# EAGLE board HTU21D Breakout-Panel-v12 (EAGLE 6.5.0), part 1 of 2
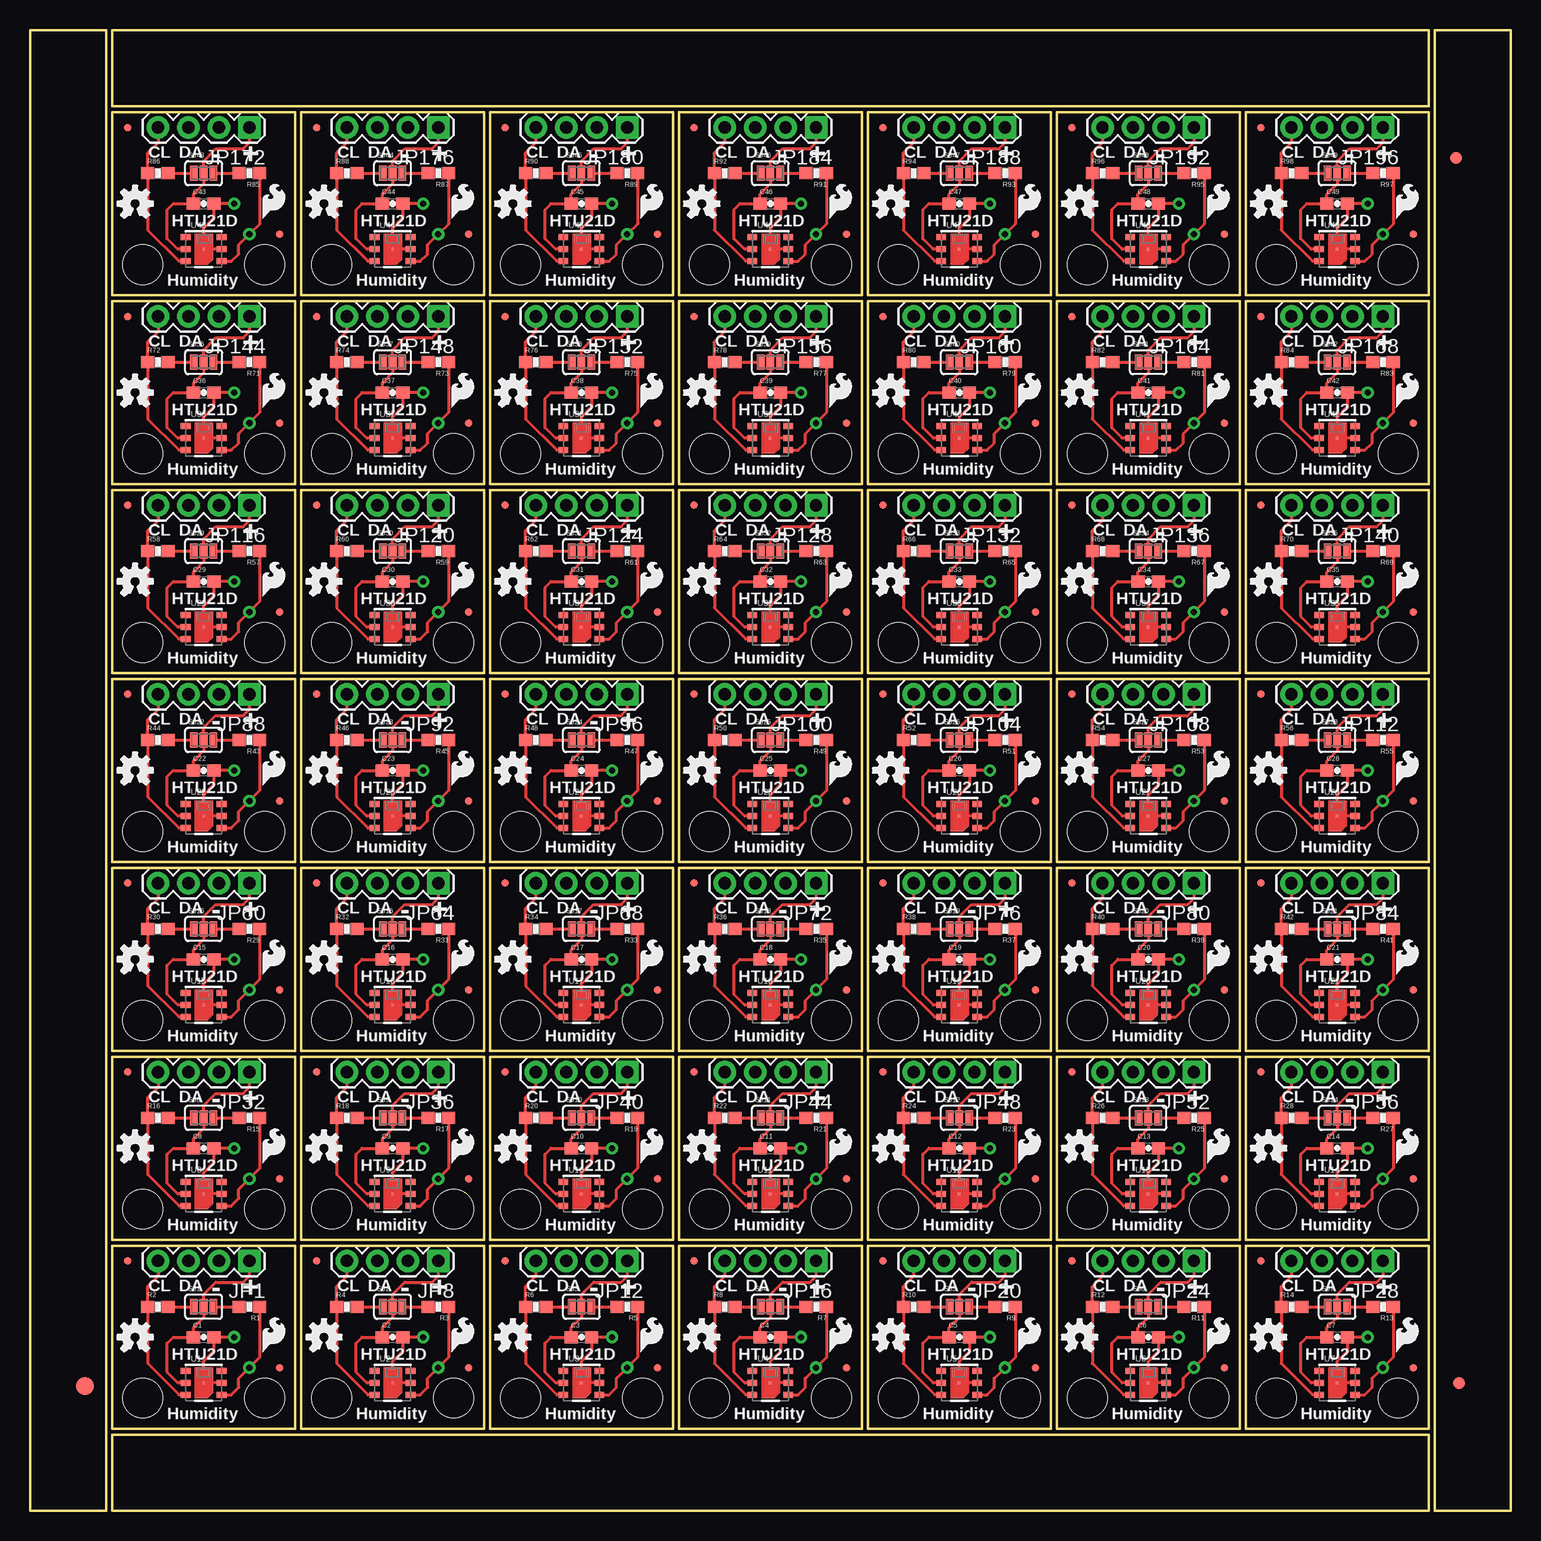
[diagram p0: board, top side]
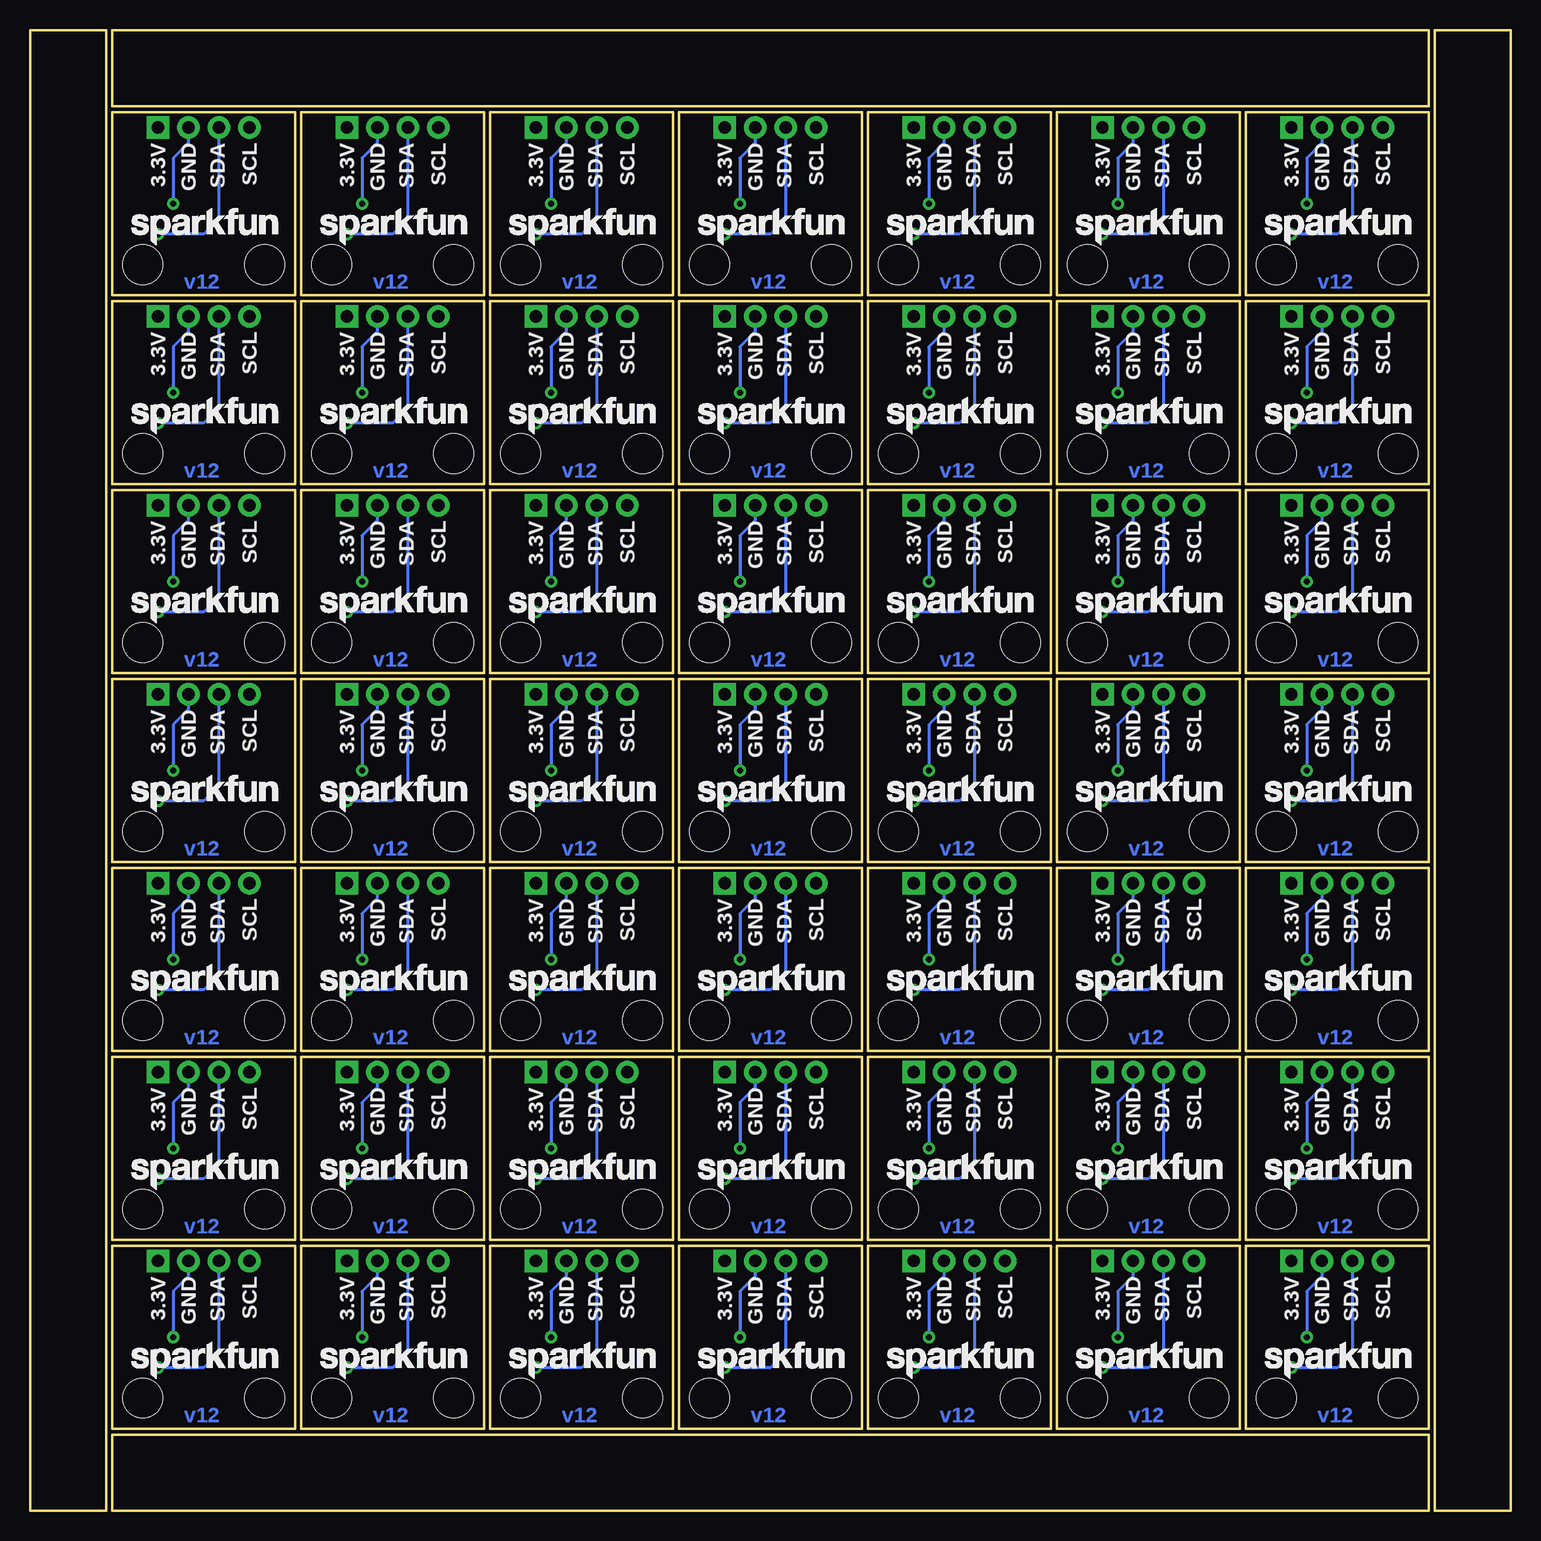
[diagram p1: board, bottom side, seen from below]

Size 123.44 x 123.44 mm. Coordinates in mm from the lower left corner, seen from the top.
Outline: 216 segments
Copper layers (1*16): Top 0.035mm / dielectric 1.5mm / Bottom 0.035mm
Design rules "SparkFun": minimum track width 8mil, minimum drill 20mil, track to track 8mil, track to pad 8mil, pad to pad 8mil, via to via 8mil, smd to smd 8mil, copper to edge 10mil, drill to drill 8mil, minimum pad ring 12mil, minimum via ring 10mil, stop-mask expansion 4mil, vias tented up to drill 25mil, thermal gap 10mil

## Footprints (pad centres in the part's own frame; a part is rotated, then mirrored left to right if it is on the bottom)
0603-CAP = smd 1.1 x 1: 1 -0.85,0; 2 0.85,0
FIDUCIAL-1.5X3 = smd 1.5 x 1.5: 1 0,0
FIDUCIAL-1X2 = smd 1 x 1: 1 0,0
1X04 = drill 1.016 pad 1.88 square: 1 0,0 | drill 1.016 pad 1.88: 2 2.54,0; 3 5.08,0; 4 7.62,0
MICRO-FIDUCIAL = smd 0.635 x 0.635: 1 0,0
0603-RES = smd 1.1 x 1: 1 -0.85,0; 2 0.85,0
SJ_3_PASTE1&2&3 = smd 0.635 x 1.27: 1 -0.813,0; 2 0,0; 3 0.813,0
STAND-OFF = hole 3.302: 0,0
HTU21D = smd 0.2 x 0.2: 7 0,0 | smd 0.8 x 0.5: DATA 1.5,-1; GND 1.5,0; NC@1 -1.5,1; NC@6 1.5,1; SCK -1.5,-1; VDD -1.5,0

## Placement (x,y rotation side)
C1  0.1uF  [0603-CAP]  14.48,14.48 0 top
C2  0.1uF  [0603-CAP]  30.23,14.48 0 top
C3  0.1uF  [0603-CAP]  45.97,14.48 0 top
C4  0.1uF  [0603-CAP]  61.72,14.48 0 top
C5  0.1uF  [0603-CAP]  77.47,14.48 0 top
C6  0.1uF  [0603-CAP]  93.22,14.48 0 top
C7  0.1uF  [0603-CAP]  108.97,14.48 0 top
C8  0.1uF  [0603-CAP]  14.48,30.23 0 top
C9  0.1uF  [0603-CAP]  30.23,30.23 0 top
C10  0.1uF  [0603-CAP]  45.97,30.23 0 top
C11  0.1uF  [0603-CAP]  61.72,30.23 0 top
C12  0.1uF  [0603-CAP]  77.47,30.23 0 top
C13  0.1uF  [0603-CAP]  93.22,30.23 0 top
C14  0.1uF  [0603-CAP]  108.97,30.23 0 top
C15  0.1uF  [0603-CAP]  14.48,45.97 0 top
C16  0.1uF  [0603-CAP]  30.23,45.97 0 top
C17  0.1uF  [0603-CAP]  45.97,45.97 0 top
C18  0.1uF  [0603-CAP]  61.72,45.97 0 top
C19  0.1uF  [0603-CAP]  77.47,45.97 0 top
C20  0.1uF  [0603-CAP]  93.22,45.97 0 top
C21  0.1uF  [0603-CAP]  108.97,45.97 0 top
C22  0.1uF  [0603-CAP]  14.48,61.72 0 top
C23  0.1uF  [0603-CAP]  30.23,61.72 0 top
C24  0.1uF  [0603-CAP]  45.97,61.72 0 top
C25  0.1uF  [0603-CAP]  61.72,61.72 0 top
C26  0.1uF  [0603-CAP]  77.47,61.72 0 top
C27  0.1uF  [0603-CAP]  93.22,61.72 0 top
C28  0.1uF  [0603-CAP]  108.97,61.72 0 top
C29  0.1uF  [0603-CAP]  14.48,77.47 0 top
C30  0.1uF  [0603-CAP]  30.23,77.47 0 top
C31  0.1uF  [0603-CAP]  45.97,77.47 0 top
C32  0.1uF  [0603-CAP]  61.72,77.47 0 top
C33  0.1uF  [0603-CAP]  77.47,77.47 0 top
C34  0.1uF  [0603-CAP]  93.22,77.47 0 top
C35  0.1uF  [0603-CAP]  108.97,77.47 0 top
C36  0.1uF  [0603-CAP]  14.48,93.22 0 top
C37  0.1uF  [0603-CAP]  30.23,93.22 0 top
C38  0.1uF  [0603-CAP]  45.97,93.22 0 top
C39  0.1uF  [0603-CAP]  61.72,93.22 0 top
C40  0.1uF  [0603-CAP]  77.47,93.22 0 top
C41  0.1uF  [0603-CAP]  93.22,93.22 0 top
C42  0.1uF  [0603-CAP]  108.97,93.22 0 top
C43  0.1uF  [0603-CAP]  14.48,108.97 0 top
C44  0.1uF  [0603-CAP]  30.23,108.97 0 top
C45  0.1uF  [0603-CAP]  45.97,108.97 0 top
C46  0.1uF  [0603-CAP]  61.72,108.97 0 top
C47  0.1uF  [0603-CAP]  77.47,108.97 0 top
C48  0.1uF  [0603-CAP]  93.22,108.97 0 top
C49  0.1uF  [0603-CAP]  108.97,108.97 0 top
E$1  [FIDUCIAL-1.5X3]  4.57,10.41 0 top
E$4  [FIDUCIAL-1X2]  119.13,10.67 0 top
E$5  [FIDUCIAL-1X2]  118.87,112.78 180 top
JP1  [1X04]  18.29,20.83 180 top
JP2  LOGO-SFENW2  [SFE-NEW-WEB]  20.51,10.99 0 bottom
JP3  FIDUCIALUFIDUCIAL  [MICRO-FIDUCIAL]  8.13,20.83 0 top
JP4  FIDUCIALUFIDUCIAL  [MICRO-FIDUCIAL]  20.83,11.94 0 top
JP5  LOGO-SFENW2  [SFE-NEW-WEB]  36.26,10.99 0 bottom
JP6  FIDUCIALUFIDUCIAL  [MICRO-FIDUCIAL]  23.88,20.83 0 top
JP7  FIDUCIALUFIDUCIAL  [MICRO-FIDUCIAL]  36.58,11.94 0 top
JP8  [1X04]  34.04,20.83 180 top
JP9  LOGO-SFENW2  [SFE-NEW-WEB]  52.01,10.99 0 bottom
JP10  FIDUCIALUFIDUCIAL  [MICRO-FIDUCIAL]  39.62,20.83 0 top
JP11  FIDUCIALUFIDUCIAL  [MICRO-FIDUCIAL]  52.32,11.94 0 top
JP12  [1X04]  49.78,20.83 180 top
JP13  LOGO-SFENW2  [SFE-NEW-WEB]  67.75,10.99 0 bottom
JP14  FIDUCIALUFIDUCIAL  [MICRO-FIDUCIAL]  55.37,20.83 0 top
JP15  FIDUCIALUFIDUCIAL  [MICRO-FIDUCIAL]  68.07,11.94 0 top
JP16  [1X04]  65.53,20.83 180 top
JP17  LOGO-SFENW2  [SFE-NEW-WEB]  83.5,10.99 0 bottom
JP18  FIDUCIALUFIDUCIAL  [MICRO-FIDUCIAL]  71.12,20.83 0 top
JP19  FIDUCIALUFIDUCIAL  [MICRO-FIDUCIAL]  83.82,11.94 0 top
JP20  [1X04]  81.28,20.83 180 top
JP21  LOGO-SFENW2  [SFE-NEW-WEB]  99.25,10.99 0 bottom
JP22  FIDUCIALUFIDUCIAL  [MICRO-FIDUCIAL]  86.87,20.83 0 top
JP23  FIDUCIALUFIDUCIAL  [MICRO-FIDUCIAL]  99.57,11.94 0 top
JP24  [1X04]  97.03,20.83 180 top
JP25  LOGO-SFENW2  [SFE-NEW-WEB]  115,10.99 0 bottom
JP26  FIDUCIALUFIDUCIAL  [MICRO-FIDUCIAL]  102.62,20.83 0 top
JP27  FIDUCIALUFIDUCIAL  [MICRO-FIDUCIAL]  115.32,11.94 0 top
JP28  [1X04]  112.78,20.83 180 top
JP29  LOGO-SFENW2  [SFE-NEW-WEB]  20.51,26.73 0 bottom
JP30  FIDUCIALUFIDUCIAL  [MICRO-FIDUCIAL]  8.13,36.58 0 top
JP31  FIDUCIALUFIDUCIAL  [MICRO-FIDUCIAL]  20.83,27.69 0 top
JP32  [1X04]  18.29,36.58 180 top
JP33  LOGO-SFENW2  [SFE-NEW-WEB]  36.26,26.73 0 bottom
JP34  FIDUCIALUFIDUCIAL  [MICRO-FIDUCIAL]  23.88,36.58 0 top
JP35  FIDUCIALUFIDUCIAL  [MICRO-FIDUCIAL]  36.58,27.69 0 top
JP36  [1X04]  34.04,36.58 180 top
JP37  LOGO-SFENW2  [SFE-NEW-WEB]  52.01,26.73 0 bottom
JP38  FIDUCIALUFIDUCIAL  [MICRO-FIDUCIAL]  39.62,36.58 0 top
JP39  FIDUCIALUFIDUCIAL  [MICRO-FIDUCIAL]  52.32,27.69 0 top
JP40  [1X04]  49.78,36.58 180 top
JP41  LOGO-SFENW2  [SFE-NEW-WEB]  67.75,26.73 0 bottom
JP42  FIDUCIALUFIDUCIAL  [MICRO-FIDUCIAL]  55.37,36.58 0 top
JP43  FIDUCIALUFIDUCIAL  [MICRO-FIDUCIAL]  68.07,27.69 0 top
JP44  [1X04]  65.53,36.58 180 top
JP45  LOGO-SFENW2  [SFE-NEW-WEB]  83.5,26.73 0 bottom
JP46  FIDUCIALUFIDUCIAL  [MICRO-FIDUCIAL]  71.12,36.58 0 top
JP47  FIDUCIALUFIDUCIAL  [MICRO-FIDUCIAL]  83.82,27.69 0 top
JP48  [1X04]  81.28,36.58 180 top
JP49  LOGO-SFENW2  [SFE-NEW-WEB]  99.25,26.73 0 bottom
JP50  FIDUCIALUFIDUCIAL  [MICRO-FIDUCIAL]  86.87,36.58 0 top
JP51  FIDUCIALUFIDUCIAL  [MICRO-FIDUCIAL]  99.57,27.69 0 top
JP52  [1X04]  97.03,36.58 180 top
JP53  LOGO-SFENW2  [SFE-NEW-WEB]  115,26.73 0 bottom
JP54  FIDUCIALUFIDUCIAL  [MICRO-FIDUCIAL]  102.62,36.58 0 top
JP55  FIDUCIALUFIDUCIAL  [MICRO-FIDUCIAL]  115.32,27.69 0 top
JP56  [1X04]  112.78,36.58 180 top
JP57  LOGO-SFENW2  [SFE-NEW-WEB]  20.51,42.48 0 bottom
JP58  FIDUCIALUFIDUCIAL  [MICRO-FIDUCIAL]  8.13,52.32 0 top
JP59  FIDUCIALUFIDUCIAL  [MICRO-FIDUCIAL]  20.83,43.43 0 top
JP60  [1X04]  18.29,52.32 180 top
JP61  LOGO-SFENW2  [SFE-NEW-WEB]  36.26,42.48 0 bottom
JP62  FIDUCIALUFIDUCIAL  [MICRO-FIDUCIAL]  23.88,52.32 0 top
JP63  FIDUCIALUFIDUCIAL  [MICRO-FIDUCIAL]  36.58,43.43 0 top
JP64  [1X04]  34.04,52.32 180 top
JP65  LOGO-SFENW2  [SFE-NEW-WEB]  52.01,42.48 0 bottom
JP66  FIDUCIALUFIDUCIAL  [MICRO-FIDUCIAL]  39.62,52.32 0 top
JP67  FIDUCIALUFIDUCIAL  [MICRO-FIDUCIAL]  52.32,43.43 0 top
JP68  [1X04]  49.78,52.32 180 top
JP69  LOGO-SFENW2  [SFE-NEW-WEB]  67.75,42.48 0 bottom
JP70  FIDUCIALUFIDUCIAL  [MICRO-FIDUCIAL]  55.37,52.32 0 top
JP71  FIDUCIALUFIDUCIAL  [MICRO-FIDUCIAL]  68.07,43.43 0 top
JP72  [1X04]  65.53,52.32 180 top
JP73  LOGO-SFENW2  [SFE-NEW-WEB]  83.5,42.48 0 bottom
JP74  FIDUCIALUFIDUCIAL  [MICRO-FIDUCIAL]  71.12,52.32 0 top
JP75  FIDUCIALUFIDUCIAL  [MICRO-FIDUCIAL]  83.82,43.43 0 top
JP76  [1X04]  81.28,52.32 180 top
JP77  LOGO-SFENW2  [SFE-NEW-WEB]  99.25,42.48 0 bottom
JP78  FIDUCIALUFIDUCIAL  [MICRO-FIDUCIAL]  86.87,52.32 0 top
JP79  FIDUCIALUFIDUCIAL  [MICRO-FIDUCIAL]  99.57,43.43 0 top
JP80  [1X04]  97.03,52.32 180 top
JP81  LOGO-SFENW2  [SFE-NEW-WEB]  115,42.48 0 bottom
JP82  FIDUCIALUFIDUCIAL  [MICRO-FIDUCIAL]  102.62,52.32 0 top
JP83  FIDUCIALUFIDUCIAL  [MICRO-FIDUCIAL]  115.32,43.43 0 top
JP84  [1X04]  112.78,52.32 180 top
JP85  LOGO-SFENW2  [SFE-NEW-WEB]  20.51,58.23 0 bottom
JP86  FIDUCIALUFIDUCIAL  [MICRO-FIDUCIAL]  8.13,68.07 0 top
JP87  FIDUCIALUFIDUCIAL  [MICRO-FIDUCIAL]  20.83,59.18 0 top
JP88  [1X04]  18.29,68.07 180 top
JP89  LOGO-SFENW2  [SFE-NEW-WEB]  36.26,58.23 0 bottom
JP90  FIDUCIALUFIDUCIAL  [MICRO-FIDUCIAL]  23.88,68.07 0 top
JP91  FIDUCIALUFIDUCIAL  [MICRO-FIDUCIAL]  36.58,59.18 0 top
JP92  [1X04]  34.04,68.07 180 top
JP93  LOGO-SFENW2  [SFE-NEW-WEB]  52.01,58.23 0 bottom
JP94  FIDUCIALUFIDUCIAL  [MICRO-FIDUCIAL]  39.62,68.07 0 top
JP95  FIDUCIALUFIDUCIAL  [MICRO-FIDUCIAL]  52.32,59.18 0 top
JP96  [1X04]  49.78,68.07 180 top
JP97  LOGO-SFENW2  [SFE-NEW-WEB]  67.75,58.23 0 bottom
JP98  FIDUCIALUFIDUCIAL  [MICRO-FIDUCIAL]  55.37,68.07 0 top
JP99  FIDUCIALUFIDUCIAL  [MICRO-FIDUCIAL]  68.07,59.18 0 top
JP100  [1X04]  65.53,68.07 180 top
JP101  LOGO-SFENW2  [SFE-NEW-WEB]  83.5,58.23 0 bottom
JP102  FIDUCIALUFIDUCIAL  [MICRO-FIDUCIAL]  71.12,68.07 0 top
JP103  FIDUCIALUFIDUCIAL  [MICRO-FIDUCIAL]  83.82,59.18 0 top
JP104  [1X04]  81.28,68.07 180 top
JP105  LOGO-SFENW2  [SFE-NEW-WEB]  99.25,58.23 0 bottom
JP106  FIDUCIALUFIDUCIAL  [MICRO-FIDUCIAL]  86.87,68.07 0 top
JP107  FIDUCIALUFIDUCIAL  [MICRO-FIDUCIAL]  99.57,59.18 0 top
JP108  [1X04]  97.03,68.07 180 top
JP109  LOGO-SFENW2  [SFE-NEW-WEB]  115,58.23 0 bottom
JP110  FIDUCIALUFIDUCIAL  [MICRO-FIDUCIAL]  102.62,68.07 0 top
JP111  FIDUCIALUFIDUCIAL  [MICRO-FIDUCIAL]  115.32,59.18 0 top
JP112  [1X04]  112.78,68.07 180 top
JP113  LOGO-SFENW2  [SFE-NEW-WEB]  20.51,73.98 0 bottom
JP114  FIDUCIALUFIDUCIAL  [MICRO-FIDUCIAL]  8.13,83.82 0 top
JP115  FIDUCIALUFIDUCIAL  [MICRO-FIDUCIAL]  20.83,74.93 0 top
JP116  [1X04]  18.29,83.82 180 top
JP117  LOGO-SFENW2  [SFE-NEW-WEB]  36.26,73.98 0 bottom
JP118  FIDUCIALUFIDUCIAL  [MICRO-FIDUCIAL]  23.88,83.82 0 top
JP119  FIDUCIALUFIDUCIAL  [MICRO-FIDUCIAL]  36.58,74.93 0 top
JP120  [1X04]  34.04,83.82 180 top
JP121  LOGO-SFENW2  [SFE-NEW-WEB]  52.01,73.98 0 bottom
JP122  FIDUCIALUFIDUCIAL  [MICRO-FIDUCIAL]  39.62,83.82 0 top
JP123  FIDUCIALUFIDUCIAL  [MICRO-FIDUCIAL]  52.32,74.93 0 top
JP124  [1X04]  49.78,83.82 180 top
JP125  LOGO-SFENW2  [SFE-NEW-WEB]  67.75,73.98 0 bottom
JP126  FIDUCIALUFIDUCIAL  [MICRO-FIDUCIAL]  55.37,83.82 0 top
JP127  FIDUCIALUFIDUCIAL  [MICRO-FIDUCIAL]  68.07,74.93 0 top
JP128  [1X04]  65.53,83.82 180 top
JP129  LOGO-SFENW2  [SFE-NEW-WEB]  83.5,73.98 0 bottom
JP130  FIDUCIALUFIDUCIAL  [MICRO-FIDUCIAL]  71.12,83.82 0 top
JP131  FIDUCIALUFIDUCIAL  [MICRO-FIDUCIAL]  83.82,74.93 0 top
JP132  [1X04]  81.28,83.82 180 top
JP133  LOGO-SFENW2  [SFE-NEW-WEB]  99.25,73.98 0 bottom
JP134  FIDUCIALUFIDUCIAL  [MICRO-FIDUCIAL]  86.87,83.82 0 top
JP135  FIDUCIALUFIDUCIAL  [MICRO-FIDUCIAL]  99.57,74.93 0 top
JP136  [1X04]  97.03,83.82 180 top
JP137  LOGO-SFENW2  [SFE-NEW-WEB]  115,73.98 0 bottom
JP138  FIDUCIALUFIDUCIAL  [MICRO-FIDUCIAL]  102.62,83.82 0 top
JP139  FIDUCIALUFIDUCIAL  [MICRO-FIDUCIAL]  115.32,74.93 0 top
JP140  [1X04]  112.78,83.82 180 top
JP141  LOGO-SFENW2  [SFE-NEW-WEB]  20.51,89.73 0 bottom
JP142  FIDUCIALUFIDUCIAL  [MICRO-FIDUCIAL]  8.13,99.57 0 top
JP143  FIDUCIALUFIDUCIAL  [MICRO-FIDUCIAL]  20.83,90.68 0 top
JP144  [1X04]  18.29,99.57 180 top
JP145  LOGO-SFENW2  [SFE-NEW-WEB]  36.26,89.73 0 bottom
JP146  FIDUCIALUFIDUCIAL  [MICRO-FIDUCIAL]  23.88,99.57 0 top
JP147  FIDUCIALUFIDUCIAL  [MICRO-FIDUCIAL]  36.58,90.68 0 top
JP148  [1X04]  34.04,99.57 180 top
JP149  LOGO-SFENW2  [SFE-NEW-WEB]  52.01,89.73 0 bottom
JP150  FIDUCIALUFIDUCIAL  [MICRO-FIDUCIAL]  39.62,99.57 0 top
JP151  FIDUCIALUFIDUCIAL  [MICRO-FIDUCIAL]  52.32,90.68 0 top
JP152  [1X04]  49.78,99.57 180 top
JP153  LOGO-SFENW2  [SFE-NEW-WEB]  67.75,89.73 0 bottom
JP154  FIDUCIALUFIDUCIAL  [MICRO-FIDUCIAL]  55.37,99.57 0 top
JP155  FIDUCIALUFIDUCIAL  [MICRO-FIDUCIAL]  68.07,90.68 0 top
JP156  [1X04]  65.53,99.57 180 top
JP157  LOGO-SFENW2  [SFE-NEW-WEB]  83.5,89.73 0 bottom
JP158  FIDUCIALUFIDUCIAL  [MICRO-FIDUCIAL]  71.12,99.57 0 top
JP159  FIDUCIALUFIDUCIAL  [MICRO-FIDUCIAL]  83.82,90.68 0 top
JP160  [1X04]  81.28,99.57 180 top
JP161  LOGO-SFENW2  [SFE-NEW-WEB]  99.25,89.73 0 bottom
JP162  FIDUCIALUFIDUCIAL  [MICRO-FIDUCIAL]  86.87,99.57 0 top
JP163  FIDUCIALUFIDUCIAL  [MICRO-FIDUCIAL]  99.57,90.68 0 top
JP164  [1X04]  97.03,99.57 180 top
JP165  LOGO-SFENW2  [SFE-NEW-WEB]  115,89.73 0 bottom
JP166  FIDUCIALUFIDUCIAL  [MICRO-FIDUCIAL]  102.62,99.57 0 top
JP167  FIDUCIALUFIDUCIAL  [MICRO-FIDUCIAL]  115.32,90.68 0 top
JP168  [1X04]  112.78,99.57 180 top
JP169  LOGO-SFENW2  [SFE-NEW-WEB]  20.51,105.47 0 bottom
JP170  FIDUCIALUFIDUCIAL  [MICRO-FIDUCIAL]  8.13,115.32 0 top
JP171  FIDUCIALUFIDUCIAL  [MICRO-FIDUCIAL]  20.83,106.43 0 top
JP172  [1X04]  18.29,115.32 180 top
JP173  LOGO-SFENW2  [SFE-NEW-WEB]  36.26,105.47 0 bottom
JP174  FIDUCIALUFIDUCIAL  [MICRO-FIDUCIAL]  23.88,115.32 0 top
JP175  FIDUCIALUFIDUCIAL  [MICRO-FIDUCIAL]  36.58,106.43 0 top
JP176  [1X04]  34.04,115.32 180 top
JP177  LOGO-SFENW2  [SFE-NEW-WEB]  52.01,105.47 0 bottom
JP178  FIDUCIALUFIDUCIAL  [MICRO-FIDUCIAL]  39.62,115.32 0 top
JP179  FIDUCIALUFIDUCIAL  [MICRO-FIDUCIAL]  52.32,106.43 0 top
JP180  [1X04]  49.78,115.32 180 top
JP181  LOGO-SFENW2  [SFE-NEW-WEB]  67.75,105.47 0 bottom
JP182  FIDUCIALUFIDUCIAL  [MICRO-FIDUCIAL]  55.37,115.32 0 top
JP183  FIDUCIALUFIDUCIAL  [MICRO-FIDUCIAL]  68.07,106.43 0 top
JP184  [1X04]  65.53,115.32 180 top
JP185  LOGO-SFENW2  [SFE-NEW-WEB]  83.5,105.47 0 bottom
JP186  FIDUCIALUFIDUCIAL  [MICRO-FIDUCIAL]  71.12,115.32 0 top
JP187  FIDUCIALUFIDUCIAL  [MICRO-FIDUCIAL]  83.82,106.43 0 top
JP188  [1X04]  81.28,115.32 180 top
JP189  LOGO-SFENW2  [SFE-NEW-WEB]  99.25,105.47 0 bottom
JP190  FIDUCIALUFIDUCIAL  [MICRO-FIDUCIAL]  86.87,115.32 0 top
JP191  FIDUCIALUFIDUCIAL  [MICRO-FIDUCIAL]  99.57,106.43 0 top
JP192  [1X04]  97.03,115.32 180 top
JP193  LOGO-SFENW2  [SFE-NEW-WEB]  115,105.47 0 bottom
JP194  FIDUCIALUFIDUCIAL  [MICRO-FIDUCIAL]  102.62,115.32 0 top
JP195  FIDUCIALUFIDUCIAL  [MICRO-FIDUCIAL]  115.32,106.43 0 top
JP196  [1X04]  112.78,115.32 180 top
LOGO1  LOGO-SFESK  [SFE-LOGO-FLAME]  19.4,13.27 0 top
LOGO2  OSHW-LOGOS  [OSHW-LOGO-S]  8.76,14.48 0 top
LOGO3  LOGO-SFESK  [SFE-LOGO-FLAME]  35.15,13.27 0 top
LOGO4  OSHW-LOGOS  [OSHW-LOGO-S]  24.51,14.48 0 top
LOGO5  LOGO-SFESK  [SFE-LOGO-FLAME]  50.9,13.27 0 top
LOGO6  OSHW-LOGOS  [OSHW-LOGO-S]  40.26,14.48 0 top
LOGO7  LOGO-SFESK  [SFE-LOGO-FLAME]  66.64,13.27 0 top
LOGO8  OSHW-LOGOS  [OSHW-LOGO-S]  56.01,14.48 0 top
LOGO9  LOGO-SFESK  [SFE-LOGO-FLAME]  82.39,13.27 0 top
LOGO10  OSHW-LOGOS  [OSHW-LOGO-S]  71.75,14.48 0 top
LOGO11  LOGO-SFESK  [SFE-LOGO-FLAME]  98.14,13.27 0 top
LOGO12  OSHW-LOGOS  [OSHW-LOGO-S]  87.5,14.48 0 top
LOGO13  LOGO-SFESK  [SFE-LOGO-FLAME]  113.89,13.27 0 top
LOGO14  OSHW-LOGOS  [OSHW-LOGO-S]  103.25,14.48 0 top
LOGO15  LOGO-SFESK  [SFE-LOGO-FLAME]  19.4,29.02 0 top
LOGO16  OSHW-LOGOS  [OSHW-LOGO-S]  8.76,30.23 0 top
LOGO17  LOGO-SFESK  [SFE-LOGO-FLAME]  35.15,29.02 0 top
LOGO18  OSHW-LOGOS  [OSHW-LOGO-S]  24.51,30.23 0 top
LOGO19  LOGO-SFESK  [SFE-LOGO-FLAME]  50.9,29.02 0 top
LOGO20  OSHW-LOGOS  [OSHW-LOGO-S]  40.26,30.23 0 top
LOGO21  LOGO-SFESK  [SFE-LOGO-FLAME]  66.64,29.02 0 top
LOGO22  OSHW-LOGOS  [OSHW-LOGO-S]  56.01,30.23 0 top
LOGO23  LOGO-SFESK  [SFE-LOGO-FLAME]  82.39,29.02 0 top
LOGO24  OSHW-LOGOS  [OSHW-LOGO-S]  71.75,30.23 0 top
LOGO25  LOGO-SFESK  [SFE-LOGO-FLAME]  98.14,29.02 0 top
LOGO26  OSHW-LOGOS  [OSHW-LOGO-S]  87.5,30.23 0 top
LOGO27  LOGO-SFESK  [SFE-LOGO-FLAME]  113.89,29.02 0 top
LOGO28  OSHW-LOGOS  [OSHW-LOGO-S]  103.25,30.23 0 top
LOGO29  LOGO-SFESK  [SFE-LOGO-FLAME]  19.4,44.77 0 top
LOGO30  OSHW-LOGOS  [OSHW-LOGO-S]  8.76,45.97 0 top
LOGO31  LOGO-SFESK  [SFE-LOGO-FLAME]  35.15,44.77 0 top
LOGO32  OSHW-LOGOS  [OSHW-LOGO-S]  24.51,45.97 0 top
LOGO33  LOGO-SFESK  [SFE-LOGO-FLAME]  50.9,44.77 0 top
LOGO34  OSHW-LOGOS  [OSHW-LOGO-S]  40.26,45.97 0 top
LOGO35  LOGO-SFESK  [SFE-LOGO-FLAME]  66.64,44.77 0 top
LOGO36  OSHW-LOGOS  [OSHW-LOGO-S]  56.01,45.97 0 top
LOGO37  LOGO-SFESK  [SFE-LOGO-FLAME]  82.39,44.77 0 top
LOGO38  OSHW-LOGOS  [OSHW-LOGO-S]  71.75,45.97 0 top
LOGO39  LOGO-SFESK  [SFE-LOGO-FLAME]  98.14,44.77 0 top
LOGO40  OSHW-LOGOS  [OSHW-LOGO-S]  87.5,45.97 0 top
LOGO41  LOGO-SFESK  [SFE-LOGO-FLAME]  113.89,44.77 0 top
LOGO42  OSHW-LOGOS  [OSHW-LOGO-S]  103.25,45.97 0 top
LOGO43  LOGO-SFESK  [SFE-LOGO-FLAME]  19.4,60.52 0 top
LOGO44  OSHW-LOGOS  [OSHW-LOGO-S]  8.76,61.72 0 top
LOGO45  LOGO-SFESK  [SFE-LOGO-FLAME]  35.15,60.52 0 top
LOGO46  OSHW-LOGOS  [OSHW-LOGO-S]  24.51,61.72 0 top
LOGO47  LOGO-SFESK  [SFE-LOGO-FLAME]  50.9,60.52 0 top
LOGO48  OSHW-LOGOS  [OSHW-LOGO-S]  40.26,61.72 0 top
LOGO49  LOGO-SFESK  [SFE-LOGO-FLAME]  66.64,60.52 0 top
LOGO50  OSHW-LOGOS  [OSHW-LOGO-S]  56.01,61.72 0 top
LOGO51  LOGO-SFESK  [SFE-LOGO-FLAME]  82.39,60.52 0 top
LOGO52  OSHW-LOGOS  [OSHW-LOGO-S]  71.75,61.72 0 top
LOGO53  LOGO-SFESK  [SFE-LOGO-FLAME]  98.14,60.52 0 top
LOGO54  OSHW-LOGOS  [OSHW-LOGO-S]  87.5,61.72 0 top
LOGO55  LOGO-SFESK  [SFE-LOGO-FLAME]  113.89,60.52 0 top
LOGO56  OSHW-LOGOS  [OSHW-LOGO-S]  103.25,61.72 0 top
LOGO57  LOGO-SFESK  [SFE-LOGO-FLAME]  19.4,76.26 0 top
LOGO58  OSHW-LOGOS  [OSHW-LOGO-S]  8.76,77.47 0 top
LOGO59  LOGO-SFESK  [SFE-LOGO-FLAME]  35.15,76.26 0 top
LOGO60  OSHW-LOGOS  [OSHW-LOGO-S]  24.51,77.47 0 top
LOGO61  LOGO-SFESK  [SFE-LOGO-FLAME]  50.9,76.26 0 top
LOGO62  OSHW-LOGOS  [OSHW-LOGO-S]  40.26,77.47 0 top
LOGO63  LOGO-SFESK  [SFE-LOGO-FLAME]  66.64,76.26 0 top
LOGO64  OSHW-LOGOS  [OSHW-LOGO-S]  56.01,77.47 0 top
LOGO65  LOGO-SFESK  [SFE-LOGO-FLAME]  82.39,76.26 0 top
LOGO66  OSHW-LOGOS  [OSHW-LOGO-S]  71.75,77.47 0 top
LOGO67  LOGO-SFESK  [SFE-LOGO-FLAME]  98.14,76.26 0 top
LOGO68  OSHW-LOGOS  [OSHW-LOGO-S]  87.5,77.47 0 top
LOGO69  LOGO-SFESK  [SFE-LOGO-FLAME]  113.89,76.26 0 top
LOGO70  OSHW-LOGOS  [OSHW-LOGO-S]  103.25,77.47 0 top
LOGO71  LOGO-SFESK  [SFE-LOGO-FLAME]  19.4,92.01 0 top
LOGO72  OSHW-LOGOS  [OSHW-LOGO-S]  8.76,93.22 0 top
LOGO73  LOGO-SFESK  [SFE-LOGO-FLAME]  35.15,92.01 0 top
LOGO74  OSHW-LOGOS  [OSHW-LOGO-S]  24.51,93.22 0 top
LOGO75  LOGO-SFESK  [SFE-LOGO-FLAME]  50.9,92.01 0 top
LOGO76  OSHW-LOGOS  [OSHW-LOGO-S]  40.26,93.22 0 top
LOGO77  LOGO-SFESK  [SFE-LOGO-FLAME]  66.64,92.01 0 top
LOGO78  OSHW-LOGOS  [OSHW-LOGO-S]  56.01,93.22 0 top
LOGO79  LOGO-SFESK  [SFE-LOGO-FLAME]  82.39,92.01 0 top
LOGO80  OSHW-LOGOS  [OSHW-LOGO-S]  71.75,93.22 0 top
LOGO81  LOGO-SFESK  [SFE-LOGO-FLAME]  98.14,92.01 0 top
LOGO82  OSHW-LOGOS  [OSHW-LOGO-S]  87.5,93.22 0 top
LOGO83  LOGO-SFESK  [SFE-LOGO-FLAME]  113.89,92.01 0 top
LOGO84  OSHW-LOGOS  [OSHW-LOGO-S]  103.25,93.22 0 top
LOGO85  LOGO-SFESK  [SFE-LOGO-FLAME]  19.4,107.76 0 top
LOGO86  OSHW-LOGOS  [OSHW-LOGO-S]  8.76,108.97 0 top
LOGO87  LOGO-SFESK  [SFE-LOGO-FLAME]  35.15,107.76 0 top
LOGO88  OSHW-LOGOS  [OSHW-LOGO-S]  24.51,108.97 0 top
LOGO89  LOGO-SFESK  [SFE-LOGO-FLAME]  50.9,107.76 0 top
LOGO90  OSHW-LOGOS  [OSHW-LOGO-S]  40.26,108.97 0 top
LOGO91  LOGO-SFESK  [SFE-LOGO-FLAME]  66.64,107.76 0 top
LOGO92  OSHW-LOGOS  [OSHW-LOGO-S]  56.01,108.97 0 top
LOGO93  LOGO-SFESK  [SFE-LOGO-FLAME]  82.39,107.76 0 top
LOGO94  OSHW-LOGOS  [OSHW-LOGO-S]  71.75,108.97 0 top
LOGO95  LOGO-SFESK  [SFE-LOGO-FLAME]  98.14,107.76 0 top
LOGO96  OSHW-LOGOS  [OSHW-LOGO-S]  87.5,108.97 0 top
LOGO97  LOGO-SFESK  [SFE-LOGO-FLAME]  113.89,107.76 0 top
LOGO98  OSHW-LOGOS  [OSHW-LOGO-S]  103.25,108.97 0 top
R1  4.7k  [0603-RES]  18.29,17.02 180 top
R2  4.7k  [0603-RES]  10.67,17.02 0 top
R3  4.7k  [0603-RES]  34.04,17.02 180 top
R4  4.7k  [0603-RES]  26.42,17.02 0 top
R5  4.7k  [0603-RES]  49.78,17.02 180 top
R6  4.7k  [0603-RES]  42.16,17.02 0 top
R7  4.7k  [0603-RES]  65.53,17.02 180 top
R8  4.7k  [0603-RES]  57.91,17.02 0 top
R9  4.7k  [0603-RES]  81.28,17.02 180 top
R10  4.7k  [0603-RES]  73.66,17.02 0 top
R11  4.7k  [0603-RES]  97.03,17.02 180 top
R12  4.7k  [0603-RES]  89.41,17.02 0 top
R13  4.7k  [0603-RES]  112.78,17.02 180 top
R14  4.7k  [0603-RES]  105.16,17.02 0 top
R15  4.7k  [0603-RES]  18.29,32.77 180 top
R16  4.7k  [0603-RES]  10.67,32.77 0 top
R17  4.7k  [0603-RES]  34.04,32.77 180 top
R18  4.7k  [0603-RES]  26.42,32.77 0 top
R19  4.7k  [0603-RES]  49.78,32.77 180 top
R20  4.7k  [0603-RES]  42.16,32.77 0 top
R21  4.7k  [0603-RES]  65.53,32.77 180 top
R22  4.7k  [0603-RES]  57.91,32.77 0 top
R23  4.7k  [0603-RES]  81.28,32.77 180 top
R24  4.7k  [0603-RES]  73.66,32.77 0 top
R25  4.7k  [0603-RES]  97.03,32.77 180 top
R26  4.7k  [0603-RES]  89.41,32.77 0 top
R27  4.7k  [0603-RES]  112.78,32.77 180 top
R28  4.7k  [0603-RES]  105.16,32.77 0 top
R29  4.7k  [0603-RES]  18.29,48.51 180 top
R30  4.7k  [0603-RES]  10.67,48.51 0 top
R31  4.7k  [0603-RES]  34.04,48.51 180 top
R32  4.7k  [0603-RES]  26.42,48.51 0 top
R33  4.7k  [0603-RES]  49.78,48.51 180 top
R34  4.7k  [0603-RES]  42.16,48.51 0 top
R35  4.7k  [0603-RES]  65.53,48.51 180 top
R36  4.7k  [0603-RES]  57.91,48.51 0 top
R37  4.7k  [0603-RES]  81.28,48.51 180 top
R38  4.7k  [0603-RES]  73.66,48.51 0 top
R39  4.7k  [0603-RES]  97.03,48.51 180 top
R40  4.7k  [0603-RES]  89.41,48.51 0 top
R41  4.7k  [0603-RES]  112.78,48.51 180 top
R42  4.7k  [0603-RES]  105.16,48.51 0 top
R43  4.7k  [0603-RES]  18.29,64.26 180 top
R44  4.7k  [0603-RES]  10.67,64.26 0 top
R45  4.7k  [0603-RES]  34.04,64.26 180 top
R46  4.7k  [0603-RES]  26.42,64.26 0 top
R47  4.7k  [0603-RES]  49.78,64.26 180 top
R48  4.7k  [0603-RES]  42.16,64.26 0 top
R49  4.7k  [0603-RES]  65.53,64.26 180 top
R50  4.7k  [0603-RES]  57.91,64.26 0 top
R51  4.7k  [0603-RES]  81.28,64.26 180 top
R52  4.7k  [0603-RES]  73.66,64.26 0 top
R53  4.7k  [0603-RES]  97.03,64.26 180 top
R54  4.7k  [0603-RES]  89.41,64.26 0 top
R55  4.7k  [0603-RES]  112.78,64.26 180 top
R56  4.7k  [0603-RES]  105.16,64.26 0 top
R57  4.7k  [0603-RES]  18.29,80.01 180 top
R58  4.7k  [0603-RES]  10.67,80.01 0 top
R59  4.7k  [0603-RES]  34.04,80.01 180 top
R60  4.7k  [0603-RES]  26.42,80.01 0 top
R61  4.7k  [0603-RES]  49.78,80.01 180 top
R62  4.7k  [0603-RES]  42.16,80.01 0 top
R63  4.7k  [0603-RES]  65.53,80.01 180 top
R64  4.7k  [0603-RES]  57.91,80.01 0 top
R65  4.7k  [0603-RES]  81.28,80.01 180 top
R66  4.7k  [0603-RES]  73.66,80.01 0 top
R67  4.7k  [0603-RES]  97.03,80.01 180 top
R68  4.7k  [0603-RES]  89.41,80.01 0 top
R69  4.7k  [0603-RES]  112.78,80.01 180 top
R70  4.7k  [0603-RES]  105.16,80.01 0 top
R71  4.7k  [0603-RES]  18.29,95.76 180 top
R72  4.7k  [0603-RES]  10.67,95.76 0 top
R73  4.7k  [0603-RES]  34.04,95.76 180 top
R74  4.7k  [0603-RES]  26.42,95.76 0 top
R75  4.7k  [0603-RES]  49.78,95.76 180 top
R76  4.7k  [0603-RES]  42.16,95.76 0 top
R77  4.7k  [0603-RES]  65.53,95.76 180 top
R78  4.7k  [0603-RES]  57.91,95.76 0 top
R79  4.7k  [0603-RES]  81.28,95.76 180 top
R80  4.7k  [0603-RES]  73.66,95.76 0 top
R81  4.7k  [0603-RES]  97.03,95.76 180 top
R82  4.7k  [0603-RES]  89.41,95.76 0 top
R83  4.7k  [0603-RES]  112.78,95.76 180 top
R84  4.7k  [0603-RES]  105.16,95.76 0 top
R85  4.7k  [0603-RES]  18.29,111.51 180 top
R86  4.7k  [0603-RES]  10.67,111.51 0 top
R87  4.7k  [0603-RES]  34.04,111.51 180 top
R88  4.7k  [0603-RES]  26.42,111.51 0 top
R89  4.7k  [0603-RES]  49.78,111.51 180 top
R90  4.7k  [0603-RES]  42.16,111.51 0 top
R91  4.7k  [0603-RES]  65.53,111.51 180 top
R92  4.7k  [0603-RES]  57.91,111.51 0 top
R93  4.7k  [0603-RES]  81.28,111.51 180 top
R94  4.7k  [0603-RES]  73.66,111.51 0 top
R95  4.7k  [0603-RES]  97.03,111.51 180 top
R96  4.7k  [0603-RES]  89.41,111.51 0 top
R97  4.7k  [0603-RES]  112.78,111.51 180 top
R98  4.7k  [0603-RES]  105.16,111.51 0 top
SJ1  [SJ_3_PASTE1&2&3]  14.48,17.02 0 top
SJ2  [SJ_3_PASTE1&2&3]  30.23,17.02 0 top
SJ3  [SJ_3_PASTE1&2&3]  45.97,17.02 0 top
SJ4  [SJ_3_PASTE1&2&3]  61.72,17.02 0 top
SJ5  [SJ_3_PASTE1&2&3]  77.47,17.02 0 top
SJ6  [SJ_3_PASTE1&2&3]  93.22,17.02 0 top
SJ7  [SJ_3_PASTE1&2&3]  108.97,17.02 0 top
SJ8  [SJ_3_PASTE1&2&3]  14.48,32.77 0 top
SJ9  [SJ_3_PASTE1&2&3]  30.23,32.77 0 top
SJ10  [SJ_3_PASTE1&2&3]  45.97,32.77 0 top
SJ11  [SJ_3_PASTE1&2&3]  61.72,32.77 0 top
SJ12  [SJ_3_PASTE1&2&3]  77.47,32.77 0 top
SJ13  [SJ_3_PASTE1&2&3]  93.22,32.77 0 top
SJ14  [SJ_3_PASTE1&2&3]  108.97,32.77 0 top
SJ15  [SJ_3_PASTE1&2&3]  14.48,48.51 0 top
SJ16  [SJ_3_PASTE1&2&3]  30.23,48.51 0 top
SJ17  [SJ_3_PASTE1&2&3]  45.97,48.51 0 top
SJ18  [SJ_3_PASTE1&2&3]  61.72,48.51 0 top
SJ19  [SJ_3_PASTE1&2&3]  77.47,48.51 0 top
SJ20  [SJ_3_PASTE1&2&3]  93.22,48.51 0 top
SJ21  [SJ_3_PASTE1&2&3]  108.97,48.51 0 top
SJ22  [SJ_3_PASTE1&2&3]  14.48,64.26 0 top
SJ23  [SJ_3_PASTE1&2&3]  30.23,64.26 0 top
SJ24  [SJ_3_PASTE1&2&3]  45.97,64.26 0 top
SJ25  [SJ_3_PASTE1&2&3]  61.72,64.26 0 top
SJ26  [SJ_3_PASTE1&2&3]  77.47,64.26 0 top
SJ27  [SJ_3_PASTE1&2&3]  93.22,64.26 0 top
SJ28  [SJ_3_PASTE1&2&3]  108.97,64.26 0 top
SJ29  [SJ_3_PASTE1&2&3]  14.48,80.01 0 top
SJ30  [SJ_3_PASTE1&2&3]  30.23,80.01 0 top
SJ31  [SJ_3_PASTE1&2&3]  45.97,80.01 0 top
SJ32  [SJ_3_PASTE1&2&3]  61.72,80.01 0 top
SJ33  [SJ_3_PASTE1&2&3]  77.47,80.01 0 top
SJ34  [SJ_3_PASTE1&2&3]  93.22,80.01 0 top
SJ35  [SJ_3_PASTE1&2&3]  108.97,80.01 0 top
SJ36  [SJ_3_PASTE1&2&3]  14.48,95.76 0 top
SJ37  [SJ_3_PASTE1&2&3]  30.23,95.76 0 top
SJ38  [SJ_3_PASTE1&2&3]  45.97,95.76 0 top
SJ39  [SJ_3_PASTE1&2&3]  61.72,95.76 0 top
SJ40  [SJ_3_PASTE1&2&3]  77.47,95.76 0 top
SJ41  [SJ_3_PASTE1&2&3]  93.22,95.76 0 top
SJ42  [SJ_3_PASTE1&2&3]  108.97,95.76 0 top
SJ43  [SJ_3_PASTE1&2&3]  14.48,111.51 0 top
SJ44  [SJ_3_PASTE1&2&3]  30.23,111.51 0 top
SJ45  [SJ_3_PASTE1&2&3]  45.97,111.51 0 top
SJ46  [SJ_3_PASTE1&2&3]  61.72,111.51 0 top
SJ47  [SJ_3_PASTE1&2&3]  77.47,111.51 0 top
SJ48  [SJ_3_PASTE1&2&3]  93.22,111.51 0 top
SJ49  [SJ_3_PASTE1&2&3]  108.97,111.51 0 top
STANDOFF1  STAND-OFF  [STAND-OFF]  19.56,9.4 0 top
STANDOFF2  STAND-OFF  [STAND-OFF]  9.4,9.4 0 top
STANDOFF3  STAND-OFF  [STAND-OFF]  25.15,9.4 0 top
STANDOFF4  STAND-OFF  [STAND-OFF]  35.31,9.4 0 top
STANDOFF5  STAND-OFF  [STAND-OFF]  40.89,9.4 0 top
STANDOFF6  STAND-OFF  [STAND-OFF]  51.05,9.4 0 top
STANDOFF7  STAND-OFF  [STAND-OFF]  56.64,9.4 0 top
STANDOFF8  STAND-OFF  [STAND-OFF]  66.8,9.4 0 top
STANDOFF9  STAND-OFF  [STAND-OFF]  72.39,9.4 0 top
STANDOFF10  STAND-OFF  [STAND-OFF]  82.55,9.4 0 top
STANDOFF11  STAND-OFF  [STAND-OFF]  88.14,9.4 0 top
STANDOFF12  STAND-OFF  [STAND-OFF]  98.3,9.4 0 top
STANDOFF13  STAND-OFF  [STAND-OFF]  103.89,9.4 0 top
STANDOFF14  STAND-OFF  [STAND-OFF]  114.05,9.4 0 top
STANDOFF15  STAND-OFF  [STAND-OFF]  9.4,25.15 0 top
STANDOFF16  STAND-OFF  [STAND-OFF]  19.56,25.15 0 top
STANDOFF17  STAND-OFF  [STAND-OFF]  25.15,25.15 0 top
STANDOFF18  STAND-OFF  [STAND-OFF]  35.31,25.15 0 top
STANDOFF19  STAND-OFF  [STAND-OFF]  40.89,25.15 0 top
STANDOFF20  STAND-OFF  [STAND-OFF]  51.05,25.15 0 top
STANDOFF21  STAND-OFF  [STAND-OFF]  56.64,25.15 0 top
STANDOFF22  STAND-OFF  [STAND-OFF]  66.8,25.15 0 top
STANDOFF23  STAND-OFF  [STAND-OFF]  72.39,25.15 0 top
STANDOFF24  STAND-OFF  [STAND-OFF]  82.55,25.15 0 top
STANDOFF25  STAND-OFF  [STAND-OFF]  88.14,25.15 0 top
STANDOFF26  STAND-OFF  [STAND-OFF]  98.3,25.15 0 top
STANDOFF27  STAND-OFF  [STAND-OFF]  103.89,25.15 0 top
STANDOFF28  STAND-OFF  [STAND-OFF]  114.05,25.15 0 top
STANDOFF29  STAND-OFF  [STAND-OFF]  9.4,40.89 0 top
STANDOFF30  STAND-OFF  [STAND-OFF]  19.56,40.89 0 top
STANDOFF31  STAND-OFF  [STAND-OFF]  25.15,40.89 0 top
STANDOFF32  STAND-OFF  [STAND-OFF]  35.31,40.89 0 top
STANDOFF33  STAND-OFF  [STAND-OFF]  40.89,40.89 0 top
STANDOFF34  STAND-OFF  [STAND-OFF]  51.05,40.89 0 top
STANDOFF35  STAND-OFF  [STAND-OFF]  56.64,40.89 0 top
STANDOFF36  STAND-OFF  [STAND-OFF]  66.8,40.89 0 top
STANDOFF37  STAND-OFF  [STAND-OFF]  72.39,40.89 0 top
STANDOFF38  STAND-OFF  [STAND-OFF]  82.55,40.89 0 top
STANDOFF39  STAND-OFF  [STAND-OFF]  88.14,40.89 0 top
STANDOFF40  STAND-OFF  [STAND-OFF]  98.3,40.89 0 top
STANDOFF41  STAND-OFF  [STAND-OFF]  103.89,40.89 0 top
STANDOFF42  STAND-OFF  [STAND-OFF]  114.05,40.89 0 top
STANDOFF43  STAND-OFF  [STAND-OFF]  9.4,56.64 0 top
STANDOFF44  STAND-OFF  [STAND-OFF]  19.56,56.64 0 top
STANDOFF45  STAND-OFF  [STAND-OFF]  25.15,56.64 0 top
STANDOFF46  STAND-OFF  [STAND-OFF]  35.31,56.64 0 top
STANDOFF47  STAND-OFF  [STAND-OFF]  40.89,56.64 0 top
STANDOFF48  STAND-OFF  [STAND-OFF]  51.05,56.64 0 top
STANDOFF49  STAND-OFF  [STAND-OFF]  56.64,56.64 0 top
STANDOFF50  STAND-OFF  [STAND-OFF]  66.8,56.64 0 top
STANDOFF51  STAND-OFF  [STAND-OFF]  72.39,56.64 0 top
STANDOFF52  STAND-OFF  [STAND-OFF]  82.55,56.64 0 top
STANDOFF53  STAND-OFF  [STAND-OFF]  88.14,56.64 0 top
STANDOFF54  STAND-OFF  [STAND-OFF]  98.3,56.64 0 top
STANDOFF55  STAND-OFF  [STAND-OFF]  103.89,56.64 0 top
STANDOFF56  STAND-OFF  [STAND-OFF]  114.05,56.64 0 top
STANDOFF57  STAND-OFF  [STAND-OFF]  9.4,72.39 0 top
STANDOFF58  STAND-OFF  [STAND-OFF]  19.56,72.39 0 top
STANDOFF59  STAND-OFF  [STAND-OFF]  25.15,72.39 0 top
STANDOFF60  STAND-OFF  [STAND-OFF]  35.31,72.39 0 top
STANDOFF61  STAND-OFF  [STAND-OFF]  40.89,72.39 0 top
STANDOFF62  STAND-OFF  [STAND-OFF]  51.05,72.39 0 top
STANDOFF63  STAND-OFF  [STAND-OFF]  56.64,72.39 0 top
STANDOFF64  STAND-OFF  [STAND-OFF]  66.8,72.39 0 top
STANDOFF65  STAND-OFF  [STAND-OFF]  72.39,72.39 0 top
STANDOFF66  STAND-OFF  [STAND-OFF]  82.55,72.39 0 top
STANDOFF67  STAND-OFF  [STAND-OFF]  88.14,72.39 0 top
STANDOFF68  STAND-OFF  [STAND-OFF]  98.3,72.39 0 top
STANDOFF69  STAND-OFF  [STAND-OFF]  103.89,72.39 0 top
STANDOFF70  STAND-OFF  [STAND-OFF]  114.05,72.39 0 top
STANDOFF71  STAND-OFF  [STAND-OFF]  9.4,88.14 0 top
STANDOFF72  STAND-OFF  [STAND-OFF]  19.56,88.14 0 top
STANDOFF73  STAND-OFF  [STAND-OFF]  25.15,88.14 0 top
STANDOFF74  STAND-OFF  [STAND-OFF]  35.31,88.14 0 top
STANDOFF75  STAND-OFF  [STAND-OFF]  40.89,88.14 0 top
STANDOFF76  STAND-OFF  [STAND-OFF]  51.05,88.14 0 top
STANDOFF77  STAND-OFF  [STAND-OFF]  56.64,88.14 0 top
STANDOFF78  STAND-OFF  [STAND-OFF]  66.8,88.14 0 top
STANDOFF79  STAND-OFF  [STAND-OFF]  72.39,88.14 0 top
STANDOFF80  STAND-OFF  [STAND-OFF]  82.55,88.14 0 top
STANDOFF81  STAND-OFF  [STAND-OFF]  88.14,88.14 0 top
STANDOFF82  STAND-OFF  [STAND-OFF]  98.3,88.14 0 top
STANDOFF83  STAND-OFF  [STAND-OFF]  103.89,88.14 0 top
STANDOFF84  STAND-OFF  [STAND-OFF]  114.05,88.14 0 top
STANDOFF85  STAND-OFF  [STAND-OFF]  9.4,103.89 0 top
STANDOFF86  STAND-OFF  [STAND-OFF]  19.56,103.89 0 top
STANDOFF87  STAND-OFF  [STAND-OFF]  25.15,103.89 0 top
STANDOFF88  STAND-OFF  [STAND-OFF]  35.31,103.89 0 top
STANDOFF89  STAND-OFF  [STAND-OFF]  40.89,103.89 0 top
STANDOFF90  STAND-OFF  [STAND-OFF]  51.05,103.89 0 top
STANDOFF91  STAND-OFF  [STAND-OFF]  56.64,103.89 0 top
STANDOFF92  STAND-OFF  [STAND-OFF]  66.8,103.89 0 top
STANDOFF93  STAND-OFF  [STAND-OFF]  72.39,103.89 0 top
STANDOFF94  STAND-OFF  [STAND-OFF]  82.55,103.89 0 top
STANDOFF95  STAND-OFF  [STAND-OFF]  88.14,103.89 0 top
STANDOFF96  STAND-OFF  [STAND-OFF]  98.3,103.89 0 top
STANDOFF97  STAND-OFF  [STAND-OFF]  103.89,103.89 0 top
STANDOFF98  STAND-OFF  [STAND-OFF]  114.05,103.89 0 top
U1  HTU21D  [HTU21D]  14.48,10.67 0 top
U2  HTU21D  [HTU21D]  30.23,10.67 0 top
U3  HTU21D  [HTU21D]  45.97,10.67 0 top
U4  HTU21D  [HTU21D]  61.72,10.67 0 top
U5  HTU21D  [HTU21D]  77.47,10.67 0 top
U6  HTU21D  [HTU21D]  93.22,10.67 0 top
U7  HTU21D  [HTU21D]  108.97,10.67 0 top
U8  HTU21D  [HTU21D]  14.48,26.42 0 top
U9  HTU21D  [HTU21D]  30.23,26.42 0 top
U10  HTU21D  [HTU21D]  45.97,26.42 0 top
U11  HTU21D  [HTU21D]  61.72,26.42 0 top
U12  HTU21D  [HTU21D]  77.47,26.42 0 top
U13  HTU21D  [HTU21D]  93.22,26.42 0 top
U14  HTU21D  [HTU21D]  108.97,26.42 0 top
U15  HTU21D  [HTU21D]  14.48,42.16 0 top
U16  HTU21D  [HTU21D]  30.23,42.16 0 top
U17  HTU21D  [HTU21D]  45.97,42.16 0 top
U18  HTU21D  [HTU21D]  61.72,42.16 0 top
U19  HTU21D  [HTU21D]  77.47,42.16 0 top
U20  HTU21D  [HTU21D]  93.22,42.16 0 top
U21  HTU21D  [HTU21D]  108.97,42.16 0 top
U22  HTU21D  [HTU21D]  14.48,57.91 0 top
U23  HTU21D  [HTU21D]  30.23,57.91 0 top
U24  HTU21D  [HTU21D]  45.97,57.91 0 top
U25  HTU21D  [HTU21D]  61.72,57.91 0 top
U26  HTU21D  [HTU21D]  77.47,57.91 0 top
U27  HTU21D  [HTU21D]  93.22,57.91 0 top
U28  HTU21D  [HTU21D]  108.97,57.91 0 top
U29  HTU21D  [HTU21D]  14.48,73.66 0 top
U30  HTU21D  [HTU21D]  30.23,73.66 0 top
U31  HTU21D  [HTU21D]  45.97,73.66 0 top
U32  HTU21D  [HTU21D]  61.72,73.66 0 top
U33  HTU21D  [HTU21D]  77.47,73.66 0 top
U34  HTU21D  [HTU21D]  93.22,73.66 0 top
U35  HTU21D  [HTU21D]  108.97,73.66 0 top
U36  HTU21D  [HTU21D]  14.48,89.41 0 top
U37  HTU21D  [HTU21D]  30.23,89.41 0 top
U38  HTU21D  [HTU21D]  45.97,89.41 0 top
U39  HTU21D  [HTU21D]  61.72,89.41 0 top
U40  HTU21D  [HTU21D]  77.47,89.41 0 top
U41  HTU21D  [HTU21D]  93.22,89.41 0 top
U42  HTU21D  [HTU21D]  108.97,89.41 0 top
U43  HTU21D  [HTU21D]  14.48,105.16 0 top
U44  HTU21D  [HTU21D]  30.23,105.16 0 top
U45  HTU21D  [HTU21D]  45.97,105.16 0 top
U46  HTU21D  [HTU21D]  61.72,105.16 0 top
U47  HTU21D  [HTU21D]  77.47,105.16 0 top
U48  HTU21D  [HTU21D]  93.22,105.16 0 top
U49  HTU21D  [HTU21D]  108.97,105.16 0 top

## Library data of the parts
C1-C49 LOGO1 LOGO3 LOGO5 LOGO7 LOGO9 LOGO11 LOGO13 LOGO15 LOGO17 LOGO19 LOGO21 LOGO23 LOGO25 LOGO27 LOGO29 LOGO31 LOGO33 LOGO35 LOGO37 LOGO39 LOGO41 LOGO43 LOGO45 LOGO47 LOGO49 LOGO51 LOGO53 LOGO55 LOGO57 LOGO59 LOGO61 LOGO63 LOGO65 LOGO67 LOGO69 LOGO71 LOGO73 LOGO75 LOGO77 LOGO79 LOGO81 LOGO83 LOGO85 LOGO87 LOGO89 LOGO91 LOGO93 LOGO95 LOGO97 R1-R98 = SparkFun
E$1 E$4 E$5 JP2-JP7 JP9-JP11 JP13-JP15 JP17-JP19 JP21-JP23 JP25-JP27 JP29-JP31 JP33-JP35 JP37-JP39 JP41-JP43 JP45-JP47 JP49-JP51 JP53-JP55 JP57-JP59 JP61-JP63 JP65-JP67 JP69-JP71 JP73-JP75 JP77-JP79 JP81-JP83 JP85-JP87 JP89-JP91 JP93-JP95 JP97-JP99 JP101-JP103 JP105-JP107 JP109-JP111 JP113-JP115 JP117-JP119 JP121-JP123 JP125-JP127 JP129-JP131 JP133-JP135 JP137-JP139 JP141-JP143 JP145-JP147 JP149-JP151 JP153-JP155 JP157-JP159 JP161-JP163 JP165-JP167 JP169-JP171 JP173-JP175 JP177-JP179 JP181-JP183 JP185-JP187 JP189-JP191 JP193-JP195 LOGO2 LOGO4 LOGO6 LOGO8 LOGO10 LOGO12 LOGO14 LOGO16 LOGO18 LOGO20 LOGO22 LOGO24 LOGO26 LOGO28 LOGO30 LOGO32 LOGO34 LOGO36 LOGO38 LOGO40 LOGO42 LOGO44 LOGO46 LOGO48 LOGO50 LOGO52 LOGO54 LOGO56 LOGO58 LOGO60 LOGO62 LOGO64 LOGO66 LOGO68 LOGO70 LOGO72 LOGO74 LOGO76 LOGO78 LOGO80 LOGO82 LOGO84 LOGO86 LOGO88 LOGO90 LOGO92 LOGO94 LOGO96 LOGO98 = SparkFun-Aesthetics
JP1 JP8 JP12 JP16 JP20 JP24 JP28 JP32 JP36 JP40 JP44 JP48 JP52 JP56 JP60 JP64 JP68 JP72 JP76 JP80 JP84 JP88 JP92 JP96 JP100 JP104 JP108 JP112 JP116 JP120 JP124 JP128 JP132 JP136 JP140 JP144 JP148 JP152 JP156 JP160 JP164 JP168 JP172 JP176 JP180 JP184 JP188 JP192 JP196 = SparkFun-Connectors
SJ1-SJ49 = mike-temp
STANDOFF1-STANDOFF98 = SparkFun-Electromechanical
U1-U49 = SparkFun-Sensors

## Nets
3.3V: C1.1 JP1.1 SJ1.2 U1.VDD
3.3V1: C2.1 JP8.1 SJ2.2 U2.VDD
3.3V2: C3.1 JP12.1 SJ3.2 U3.VDD
3.3V3: C4.1 JP16.1 SJ4.2 U4.VDD
3.3V4: C5.1 JP20.1 SJ5.2 U5.VDD
3.3V5: C6.1 JP24.1 SJ6.2 U6.VDD
3.3V6: C7.1 JP28.1 SJ7.2 U7.VDD
3.3V7: C8.1 JP32.1 SJ8.2 U8.VDD
3.3V8: C9.1 JP36.1 SJ9.2 U9.VDD
3.3V9: C10.1 JP40.1 SJ10.2 U10.VDD
3.3V10: C11.1 JP44.1 SJ11.2 U11.VDD
3.3V11: C12.1 JP48.1 SJ12.2 U12.VDD
3.3V12: C13.1 JP52.1 SJ13.2 U13.VDD
3.3V13: C14.1 JP56.1 SJ14.2 U14.VDD
3.3V14: C15.1 JP60.1 SJ15.2 U15.VDD
3.3V15: C16.1 JP64.1 SJ16.2 U16.VDD
3.3V16: C17.1 JP68.1 SJ17.2 U17.VDD
3.3V17: C18.1 JP72.1 SJ18.2 U18.VDD
3.3V18: C19.1 JP76.1 SJ19.2 U19.VDD
3.3V19: C20.1 JP80.1 SJ20.2 U20.VDD
3.3V20: C21.1 JP84.1 SJ21.2 U21.VDD
3.3V21: C22.1 JP88.1 SJ22.2 U22.VDD
3.3V22: C23.1 JP92.1 SJ23.2 U23.VDD
3.3V23: C24.1 JP96.1 SJ24.2 U24.VDD
3.3V24: C25.1 JP100.1 SJ25.2 U25.VDD
3.3V25: C26.1 JP104.1 SJ26.2 U26.VDD
3.3V26: C27.1 JP108.1 SJ27.2 U27.VDD
3.3V27: C28.1 JP112.1 SJ28.2 U28.VDD
3.3V28: C29.1 JP116.1 SJ29.2 U29.VDD
3.3V29: C30.1 JP120.1 SJ30.2 U30.VDD
3.3V30: C31.1 JP124.1 SJ31.2 U31.VDD
3.3V31: C32.1 JP128.1 SJ32.2 U32.VDD
3.3V32: C33.1 JP132.1 SJ33.2 U33.VDD
3.3V33: C34.1 JP136.1 SJ34.2 U34.VDD
3.3V34: C35.1 JP140.1 SJ35.2 U35.VDD
3.3V35: C36.1 JP144.1 SJ36.2 U36.VDD
3.3V36: C37.1 JP148.1 SJ37.2 U37.VDD
3.3V37: C38.1 JP152.1 SJ38.2 U38.VDD
3.3V38: C39.1 JP156.1 SJ39.2 U39.VDD
3.3V39: C40.1 JP160.1 SJ40.2 U40.VDD
3.3V40: C41.1 JP164.1 SJ41.2 U41.VDD
3.3V41: C42.1 JP168.1 SJ42.2 U42.VDD
3.3V42: C43.1 JP172.1 SJ43.2 U43.VDD
3.3V43: C44.1 JP176.1 SJ44.2 U44.VDD
3.3V44: C45.1 JP180.1 SJ45.2 U45.VDD
3.3V45: C46.1 JP184.1 SJ46.2 U46.VDD
3.3V46: C47.1 JP188.1 SJ47.2 U47.VDD
3.3V47: C48.1 JP192.1 SJ48.2 U48.VDD
3.3V48: C49.1 JP196.1 SJ49.2 U49.VDD
GND: C1.2 JP1.2 U1.7 U1.GND
GND1: C2.2 JP8.2 U2.7 U2.GND
GND2: C3.2 JP12.2 U3.7 U3.GND
GND3: C4.2 JP16.2 U4.7 U4.GND
GND4: C5.2 JP20.2 U5.7 U5.GND
GND5: C6.2 JP24.2 U6.7 U6.GND
GND6: C7.2 JP28.2 U7.7 U7.GND
GND7: C8.2 JP32.2 U8.7 U8.GND
GND8: C9.2 JP36.2 U9.7 U9.GND
GND9: C10.2 JP40.2 U10.7 U10.GND
GND10: C11.2 JP44.2 U11.7 U11.GND
GND11: C12.2 JP48.2 U12.7 U12.GND
GND12: C13.2 JP52.2 U13.7 U13.GND
GND13: C14.2 JP56.2 U14.7 U14.GND
GND14: C15.2 JP60.2 U15.7 U15.GND
GND15: C16.2 JP64.2 U16.7 U16.GND
GND16: C17.2 JP68.2 U17.7 U17.GND
GND17: C18.2 JP72.2 U18.7 U18.GND
GND18: C19.2 JP76.2 U19.7 U19.GND
GND19: C20.2 JP80.2 U20.7 U20.GND
GND20: C21.2 JP84.2 U21.7 U21.GND
GND21: C22.2 JP88.2 U22.7 U22.GND
GND22: C23.2 JP92.2 U23.7 U23.GND
GND23: C24.2 JP96.2 U24.7 U24.GND
GND24: C25.2 JP100.2 U25.7 U25.GND
GND25: C26.2 JP104.2 U26.7 U26.GND
GND26: C27.2 JP108.2 U27.7 U27.GND
GND27: C28.2 JP112.2 U28.7 U28.GND
GND28: C29.2 JP116.2 U29.7 U29.GND
GND29: C30.2 JP120.2 U30.7 U30.GND
GND30: C31.2 JP124.2 U31.7 U31.GND
GND31: C32.2 JP128.2 U32.7 U32.GND
GND32: C33.2 JP132.2 U33.7 U33.GND
GND33: C34.2 JP136.2 U34.7 U34.GND
GND34: C35.2 JP140.2 U35.7 U35.GND
GND35: C36.2 JP144.2 U36.7 U36.GND
GND36: C37.2 JP148.2 U37.7 U37.GND
GND37: C38.2 JP152.2 U38.7 U38.GND
GND38: C39.2 JP156.2 U39.7 U39.GND
GND39: C40.2 JP160.2 U40.7 U40.GND
GND40: C41.2 JP164.2 U41.7 U41.GND
GND41: C42.2 JP168.2 U42.7 U42.GND
GND42: C43.2 JP172.2 U43.7 U43.GND
GND43: C44.2 JP176.2 U44.7 U44.GND
GND44: C45.2 JP180.2 U45.7 U45.GND
GND45: C46.2 JP184.2 U46.7 U46.GND
GND46: C47.2 JP188.2 U47.7 U47.GND
GND47: C48.2 JP192.2 U48.7 U48.GND
GND48: C49.2 JP196.2 U49.7 U49.GND
N$1: R1.2 SJ1.3
N$2: R2.2 SJ1.1
N$3: R3.2 SJ2.3
N$4: R4.2 SJ2.1
N$5: R5.2 SJ3.3
N$6: R6.2 SJ3.1
N$7: R7.2 SJ4.3
N$8: R8.2 SJ4.1
N$9: R9.2 SJ5.3
N$10: R10.2 SJ5.1
N$11: R11.2 SJ6.3
N$12: R12.2 SJ6.1
N$13: R13.2 SJ7.3
N$14: R14.2 SJ7.1
N$15: R15.2 SJ8.3
N$16: R16.2 SJ8.1
N$17: R17.2 SJ9.3
N$18: R18.2 SJ9.1
N$19: R19.2 SJ10.3
N$20: R20.2 SJ10.1
N$21: R21.2 SJ11.3
N$22: R22.2 SJ11.1
N$23: R23.2 SJ12.3
N$24: R24.2 SJ12.1
N$25: R25.2 SJ13.3
N$26: R26.2 SJ13.1
N$27: R27.2 SJ14.3
N$28: R28.2 SJ14.1
N$29: R29.2 SJ15.3
N$30: R30.2 SJ15.1
N$31: R31.2 SJ16.3
N$32: R32.2 SJ16.1
N$33: R33.2 SJ17.3
N$34: R34.2 SJ17.1
N$35: R35.2 SJ18.3
N$36: R36.2 SJ18.1
N$37: R37.2 SJ19.3
N$38: R38.2 SJ19.1
N$39: R39.2 SJ20.3
N$40: R40.2 SJ20.1
N$41: R41.2 SJ21.3
N$42: R42.2 SJ21.1
N$43: R43.2 SJ22.3
N$44: R44.2 SJ22.1
N$45: R45.2 SJ23.3
N$46: R46.2 SJ23.1
N$47: R47.2 SJ24.3
N$48: R48.2 SJ24.1
N$49: R49.2 SJ25.3
N$50: R50.2 SJ25.1
N$51: R51.2 SJ26.3
N$52: R52.2 SJ26.1
N$53: R53.2 SJ27.3
N$54: R54.2 SJ27.1
N$55: R55.2 SJ28.3
N$56: R56.2 SJ28.1
N$57: R57.2 SJ29.3
N$58: R58.2 SJ29.1
N$59: R59.2 SJ30.3
N$60: R60.2 SJ30.1
N$61: R61.2 SJ31.3
N$62: R62.2 SJ31.1
N$63: R63.2 SJ32.3
N$64: R64.2 SJ32.1
N$65: R65.2 SJ33.3
N$66: R66.2 SJ33.1
N$67: R67.2 SJ34.3
N$68: R68.2 SJ34.1
N$69: R69.2 SJ35.3
N$70: R70.2 SJ35.1
N$71: R71.2 SJ36.3
N$72: R72.2 SJ36.1
N$73: R73.2 SJ37.3
N$74: R74.2 SJ37.1
N$75: R75.2 SJ38.3
N$76: R76.2 SJ38.1
N$77: R77.2 SJ39.3
N$78: R78.2 SJ39.1
N$79: R79.2 SJ40.3
N$80: R80.2 SJ40.1
N$81: R81.2 SJ41.3
N$82: R82.2 SJ41.1
N$83: R83.2 SJ42.3
N$84: R84.2 SJ42.1
N$85: R85.2 SJ43.3
N$86: R86.2 SJ43.1
N$87: R87.2 SJ44.3
N$88: R88.2 SJ44.1
N$89: R89.2 SJ45.3
N$90: R90.2 SJ45.1
N$91: R91.2 SJ46.3
N$92: R92.2 SJ46.1
N$93: R93.2 SJ47.3
N$94: R94.2 SJ47.1
N$95: R95.2 SJ48.3
N$96: R96.2 SJ48.1
N$97: R97.2 SJ49.3
N$98: R98.2 SJ49.1
SCL: JP1.4 R2.1 U1.SCK
SCL1: JP8.4 R4.1 U2.SCK
SCL2: JP12.4 R6.1 U3.SCK
SCL3: JP16.4 R8.1 U4.SCK
SCL4: JP20.4 R10.1 U5.SCK
SCL5: JP24.4 R12.1 U6.SCK
SCL6: JP28.4 R14.1 U7.SCK
SCL7: JP32.4 R16.1 U8.SCK
SCL8: JP36.4 R18.1 U9.SCK
SCL9: JP40.4 R20.1 U10.SCK
SCL10: JP44.4 R22.1 U11.SCK
SCL11: JP48.4 R24.1 U12.SCK
SCL12: JP52.4 R26.1 U13.SCK
SCL13: JP56.4 R28.1 U14.SCK
SCL14: JP60.4 R30.1 U15.SCK
SCL15: JP64.4 R32.1 U16.SCK
SCL16: JP68.4 R34.1 U17.SCK
SCL17: JP72.4 R36.1 U18.SCK
SCL18: JP76.4 R38.1 U19.SCK
SCL19: JP80.4 R40.1 U20.SCK
SCL20: JP84.4 R42.1 U21.SCK
SCL21: JP88.4 R44.1 U22.SCK
SCL22: JP92.4 R46.1 U23.SCK
SCL23: JP96.4 R48.1 U24.SCK
SCL24: JP100.4 R50.1 U25.SCK
SCL25: JP104.4 R52.1 U26.SCK
SCL26: JP108.4 R54.1 U27.SCK
SCL27: JP112.4 R56.1 U28.SCK
SCL28: JP116.4 R58.1 U29.SCK
SCL29: JP120.4 R60.1 U30.SCK
SCL30: JP124.4 R62.1 U31.SCK
SCL31: JP128.4 R64.1 U32.SCK
SCL32: JP132.4 R66.1 U33.SCK
SCL33: JP136.4 R68.1 U34.SCK
SCL34: JP140.4 R70.1 U35.SCK
SCL35: JP144.4 R72.1 U36.SCK
SCL36: JP148.4 R74.1 U37.SCK
SCL37: JP152.4 R76.1 U38.SCK
SCL38: JP156.4 R78.1 U39.SCK
SCL39: JP160.4 R80.1 U40.SCK
SCL40: JP164.4 R82.1 U41.SCK
SCL41: JP168.4 R84.1 U42.SCK
SCL42: JP172.4 R86.1 U43.SCK
SCL43: JP176.4 R88.1 U44.SCK
SCL44: JP180.4 R90.1 U45.SCK
SCL45: JP184.4 R92.1 U46.SCK
SCL46: JP188.4 R94.1 U47.SCK
SCL47: JP192.4 R96.1 U48.SCK
SCL48: JP196.4 R98.1 U49.SCK
SDA: JP1.3 R1.1 U1.DATA
SDA1: JP8.3 R3.1 U2.DATA
SDA2: JP12.3 R5.1 U3.DATA
SDA3: JP16.3 R7.1 U4.DATA
SDA4: JP20.3 R9.1 U5.DATA
SDA5: JP24.3 R11.1 U6.DATA
SDA6: JP28.3 R13.1 U7.DATA
SDA7: JP32.3 R15.1 U8.DATA
SDA8: JP36.3 R17.1 U9.DATA
SDA9: JP40.3 R19.1 U10.DATA
SDA10: JP44.3 R21.1 U11.DATA
SDA11: JP48.3 R23.1 U12.DATA
SDA12: JP52.3 R25.1 U13.DATA
SDA13: JP56.3 R27.1 U14.DATA
SDA14: JP60.3 R29.1 U15.DATA
SDA15: JP64.3 R31.1 U16.DATA
SDA16: JP68.3 R33.1 U17.DATA
SDA17: JP72.3 R35.1 U18.DATA
SDA18: JP76.3 R37.1 U19.DATA
SDA19: JP80.3 R39.1 U20.DATA
SDA20: JP84.3 R41.1 U21.DATA
SDA21: JP88.3 R43.1 U22.DATA
SDA22: JP92.3 R45.1 U23.DATA
SDA23: JP96.3 R47.1 U24.DATA
SDA24: JP100.3 R49.1 U25.DATA
SDA25: JP104.3 R51.1 U26.DATA
SDA26: JP108.3 R53.1 U27.DATA
SDA27: JP112.3 R55.1 U28.DATA
SDA28: JP116.3 R57.1 U29.DATA
SDA29: JP120.3 R59.1 U30.DATA
SDA30: JP124.3 R61.1 U31.DATA
SDA31: JP128.3 R63.1 U32.DATA
SDA32: JP132.3 R65.1 U33.DATA
SDA33: JP136.3 R67.1 U34.DATA
SDA34: JP140.3 R69.1 U35.DATA
SDA35: JP144.3 R71.1 U36.DATA
SDA36: JP148.3 R73.1 U37.DATA
SDA37: JP152.3 R75.1 U38.DATA
SDA38: JP156.3 R77.1 U39.DATA
SDA39: JP160.3 R79.1 U40.DATA
SDA40: JP164.3 R81.1 U41.DATA
SDA41: JP168.3 R83.1 U42.DATA
SDA42: JP172.3 R85.1 U43.DATA
SDA43: JP176.3 R87.1 U44.DATA
SDA44: JP180.3 R89.1 U45.DATA
SDA45: JP184.3 R91.1 U46.DATA
SDA46: JP188.3 R93.1 U47.DATA
SDA47: JP192.3 R95.1 U48.DATA
SDA48: JP196.3 R97.1 U49.DATA